# EAGLE board satellite_layout (EAGLE 7.4.0)
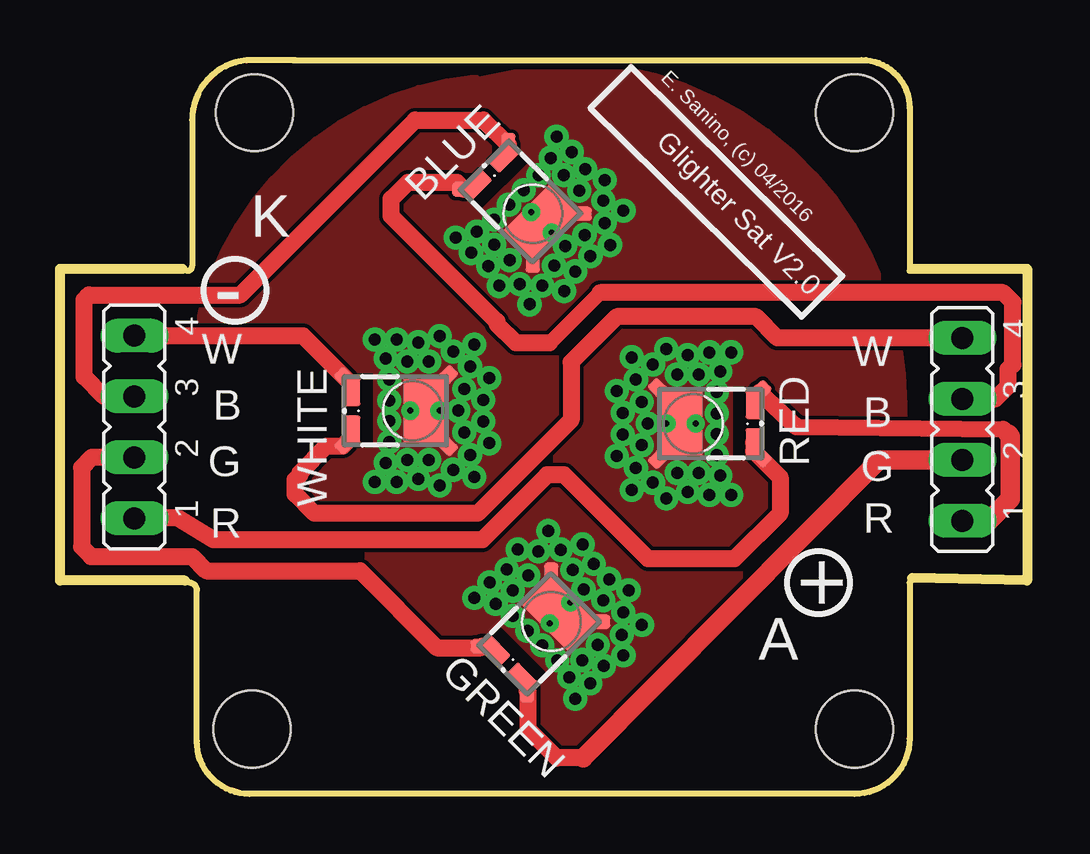
[diagram p0: board, top side]
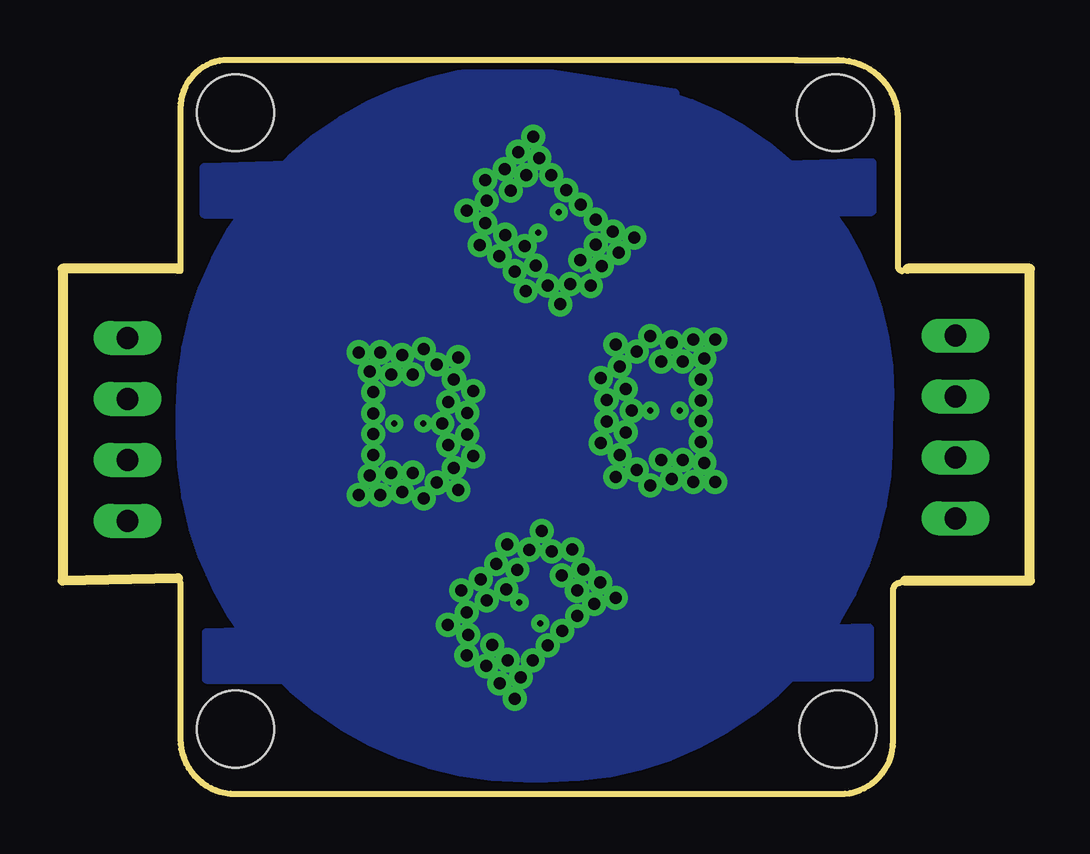
[diagram p1: board, bottom side, seen from below]

Size 40.3 x 30.6 mm. Coordinates in mm from the lower left corner, seen from the top.
Outline: 35.5,21.9 40.3,21.9 40.3,8.9 35.5,9
Outline: 5.2,8.9 0,8.9 0,21.9 5.1,21.9
Outline: 5.3,21.8 arc90 5.5,22 5.5,28.1 arc-90 8,30.6 9.7,30.6 arc90 9.8,30.6 33.4,30.6 arc-90 35.4,28.6 35.4,21.8
Outline: 35.4,8.8 35.4,2.3 arc-90 33.1,0 7.9,0 arc-90 5.7,2.2 5.7,8.5 arc90 5.4,8.8
Copper layers (1*16): Top 0.035mm / dielectric 1.5mm / Bottom 0.035mm
Design rules "SeeedStudio_2layer_DRU_no_angle_20140221": minimum track width 6mil, minimum drill 12mil, track to track 6mil, track to pad 6mil, pad to pad 6mil, via to via 6mil, smd to smd 0mil, copper to edge 10mil, drill to drill 10mil, minimum pad ring 10mil, minimum via ring 6mil, stop-mask expansion 2mil, vias tented up to drill 100mil, thermal gap 10mil
Net classes: 1 prova: width 0.6 mm
Holes 3.2 mm at 8.1,28.4 33.1,2.7 33.1,28.4 8,2.7

## Footprints (pad centres in the part's own frame; a part is rotated, then mirrored left to right if it is on the bottom)
JP4 = drill 0.914 long: 1 -3.81,0; 2 -1.27,0; 3 1.27,0; 4 3.81,0
LUXEON_REBEL+COOLPAD = smd 1.2 x 0.67: A 0.8,-2.51; C -0.8,-2.51 | smd 1 x 0.6 rotated 315: A@1 1.31,-2.75 | smd 1 x 0.6 rotated 225: C@1 -1.31,-2.75 | smd 2.8 x 1.77: TH 0,0.51 | smd 1 x 0.6 rotated 135: TH@1 -1.39,1.39 | smd 1 x 0.6 rotated 45: TH@2 1.39,1.39 | drill 0.5 pad 0.6: TH@3 2.971,-1.57; TH@4 2.971,-0.67; TH@5 2.85,0.23; TH@6 2.05,0.68; TH@7 2.05,-0.22; TH@8 2.171,-1.12; TH@9 2.764,2.575; TH@10 3.116,1.13; TH@11 2.461,1.687; TH@12 1.844,2.394; TH@13 0.9,2.15; TH@14 0,1.9; TH@15 0.45,2.95; TH@16 1.356,3.196; TH@17 1.31,-0.97; TH@18 0.43,-0.97; TH@21 -2.971,-1.57; TH@22 -2.971,-0.67; TH@23 -2.85,0.23; TH@24 -2.05,0.68; TH@25 -2.05,-0.22; TH@26 -2.171,-1.12; TH@27 -2.764,2.575; TH@28 -3.116,1.13; TH@29 -2.461,1.687; TH@30 -1.844,2.394; TH@31 -0.9,2.15; TH@32 -0.45,2.95; TH@33 -1.356,3.196; TH@34 -1.31,-0.97; TH@35 -0.43,-0.97 | drill 0.25 pad 0.4: TH@19 0,-0.095; TH@20 0,1.125

## Placement (x,y rotation side)
ANODES  [JP4]  37.6,15.2 90 top
BLUE  LUXEON_REBEL+COOLPAD  [LUXEON_REBEL+COOLPAD]  19.7,24.19 225 top
CATHODES  [JP4]  3.1,15.3 90 top
GREEN  LUXEON_REBEL+COOLPAD  [LUXEON_REBEL+COOLPAD]  20.47,7.18 315 top
RED  LUXEON_REBEL+COOLPAD  [LUXEON_REBEL+COOLPAD]  26.39,15.44 90 top
WHITE  LUXEON_REBEL+COOLPAD  [LUXEON_REBEL+COOLPAD]  14.69,15.98 270 top

## Library data of the parts
ANODES CATHODES = jumper
BLUE GREEN RED WHITE = led-lumiled; OC_FARNELL: unknown; OC_NEWARK: unknown

## Nets
GND_B [prova]: BLUE.C BLUE.C@1 CATHODES.3
GND_G [prova]: CATHODES.2 GREEN.C GREEN.C@1
GND_R [prova]: CATHODES.1 RED.C RED.C@1
GND_W [prova]: CATHODES.4 WHITE.C WHITE.C@1
TH: BLUE.TH BLUE.TH@1 BLUE.TH@2 BLUE.TH@3 BLUE.TH@4 BLUE.TH@5 BLUE.TH@6 BLUE.TH@7 BLUE.TH@8 BLUE.TH@9 BLUE.TH@10 BLUE.TH@11 BLUE.TH@12 BLUE.TH@13 BLUE.TH@14 BLUE.TH@15 BLUE.TH@16 BLUE.TH@17 BLUE.TH@18 BLUE.TH@19 BLUE.TH@20 BLUE.TH@21 BLUE.TH@22 BLUE.TH@23 BLUE.TH@24 BLUE.TH@25 BLUE.TH@26 BLUE.TH@27 BLUE.TH@28 BLUE.TH@29 BLUE.TH@30 BLUE.TH@31 BLUE.TH@32 BLUE.TH@33 BLUE.TH@34 BLUE.TH@35 GREEN.TH GREEN.TH@1 GREEN.TH@2 GREEN.TH@3 GREEN.TH@4 GREEN.TH@5 GREEN.TH@6 GREEN.TH@7 GREEN.TH@8 GREEN.TH@9 GREEN.TH@10 GREEN.TH@11 GREEN.TH@12 GREEN.TH@13 GREEN.TH@14 GREEN.TH@15 GREEN.TH@16 GREEN.TH@17 GREEN.TH@18 GREEN.TH@19 GREEN.TH@20 GREEN.TH@21 GREEN.TH@22 GREEN.TH@23 GREEN.TH@24 GREEN.TH@25 GREEN.TH@26 GREEN.TH@27 GREEN.TH@28 GREEN.TH@29 GREEN.TH@30 GREEN.TH@31 GREEN.TH@32 GREEN.TH@33 GREEN.TH@34 GREEN.TH@35 RED.TH RED.TH@1 RED.TH@2 RED.TH@3 RED.TH@4 RED.TH@5 RED.TH@6 RED.TH@7 RED.TH@8 RED.TH@9 RED.TH@10 RED.TH@11 RED.TH@12 RED.TH@13 RED.TH@14 RED.TH@15 RED.TH@16 RED.TH@17 RED.TH@18 RED.TH@19 RED.TH@20 RED.TH@21 RED.TH@22 RED.TH@23 RED.TH@24 RED.TH@25 RED.TH@26 RED.TH@27 RED.TH@28 RED.TH@29 RED.TH@30 RED.TH@31 RED.TH@32 RED.TH@33 RED.TH@34 RED.TH@35 WHITE.TH WHITE.TH@1 WHITE.TH@2 WHITE.TH@3 WHITE.TH@4 WHITE.TH@5 WHITE.TH@6 WHITE.TH@7 WHITE.TH@8 WHITE.TH@9 WHITE.TH@10 WHITE.TH@11 WHITE.TH@12 WHITE.TH@13 WHITE.TH@14 WHITE.TH@15 WHITE.TH@16 WHITE.TH@17 WHITE.TH@18 WHITE.TH@19 WHITE.TH@20 WHITE.TH@21 WHITE.TH@22 WHITE.TH@23 WHITE.TH@24 WHITE.TH@25 WHITE.TH@26 WHITE.TH@27 WHITE.TH@28 WHITE.TH@29 WHITE.TH@30 WHITE.TH@31 WHITE.TH@32 WHITE.TH@33 WHITE.TH@34 WHITE.TH@35
V_LED_B [prova]: ANODES.3 BLUE.A BLUE.A@1
V_LED_G [prova]: ANODES.2 GREEN.A GREEN.A@1
V_LED_R [prova]: ANODES.1 RED.A RED.A@1
V_LED_W [prova]: ANODES.4 WHITE.A WHITE.A@1

## Tracks (layer width: path | path; a pad name or v marks a point on that pad's centre or on a via)
GND_B
  Top 0.713: CATHODES.3 1.83,16.57 1,17.4 1,20.6 1.2,20.8 7.5,20.8 14.8,28.1 17.64,28.1 BLUE.C@1
GND_G
  Top 0.713: CATHODES.2 1.33,14.03 0.9,13.6 0.9,10.3 1.3,9.9 5.5,9.9 6.1,9.3 12.5,9.3 15.7,6.1 17.54,6.1 GREEN.C@1
GND_R
  Top 0.713: RED.C 28.9,14.3 30,13.2 30,11.7 28.1,9.8 24.5,9.8 21,13.3 20.3,13.3 17.6,10.6 6.4,10.6 4.9,11.5 CATHODES.1
GND_W
  Top 0.713: CATHODES.4 10.12,19.11 WHITE.C@1
N$1
  pour Bottom: 30.7,4.8 30.7,6.8 34.3,6.7 34.3,4.8
  pour Bottom: 6.7,4.9 6.7,6.9 10.3,6.8 10.3,4.9
  pour Bottom: 6.6,24.3 6.6,26.3 10.2,26.2 10.2,24.3
  pour Bottom: 30.8,24.2 30.8,26.2 34.4,26.1 34.4,24.2
TH
  pour Top (no thermals): 14.9,29.2 20.9,30.4 arc-90 35.1,16.2 35.1,15.2 arc-90 20.8,0.9 19.8,0.9 arc-90 5.6,14.8 5.6,15.6 arc-90 17.3,29.8
  pour Bottom (no thermals): 14.8,29.2 21.2,30.2 arc-90 35.4,16 35.4,15 arc-90 21.1,0.7 20.1,0.7 arc-90 5.9,14.6 5.9,15.4 arc-90 17.6,29.6
  pour Bottom: 28.4,4.3 29.5,4.3 29.5,4.4
V_LED_B
  Top 0.613: 22.5,20.9 20.4,18.8
  Top 0.713: ANODES.3 38.97,16.47 39.5,17 39.5,17.7 39.7,17.9 39.7,20.5 39.3,20.9 22.5,20.9 | 20.4,18.8 19,18.8 18.2,19.6 18.2,19.7 13.8,24.1 13.8,24.8 14.5,25.5 16.54,25.5 BLUE.A@1
V_LED_G
  Top 0.713: 21.8,1.5 20.7,1.5 19.5,2.7 19.5,4.27 GREEN.A@1
  Top 0.813: ANODES.2 34.13,13.93 21.8,1.5
V_LED_R
  Top 0.681: 39.3,15.2 30.69,15.3
  Top 0.713: 39.5,15 39.3,15.2 | 30.69,15.3 RED.A@1
  Top 0.813: ANODES.1 38.69,11.39 39.6,12.3 39.6,14.9 39.5,15
V_LED_W
  Top 0.713: ANODES.4 29.89,19.01 29,19.9 23.2,19.9 21.3,18 21.3,15.6 17.4,11.7 10.6,11.7 9.8,12.5 9.8,13.1 10,13.3 10,13.4 11.1,14.5 11.77,14.5 WHITE.A@1

## Text on the board
tPlace: E. Sanino, (c) 04/2016 | Glighter Sat V2.0 | W | W | G | G | R | R
tNames: K | - | B | B | + | A